# Altium PCB MainBlock.PcbDoc (part 2 of 2)
Units mm, origin at the board's own origin, x right, y up, seen from the top; angles counter-clockwise.
Board outline 152.4 x 101.6 mm, 2 copper layers (Top Layer, Bottom Layer); 89 components, 179 nets, 467 pads, 175 vias.
Unrouted connection lines stored in the file: 9.
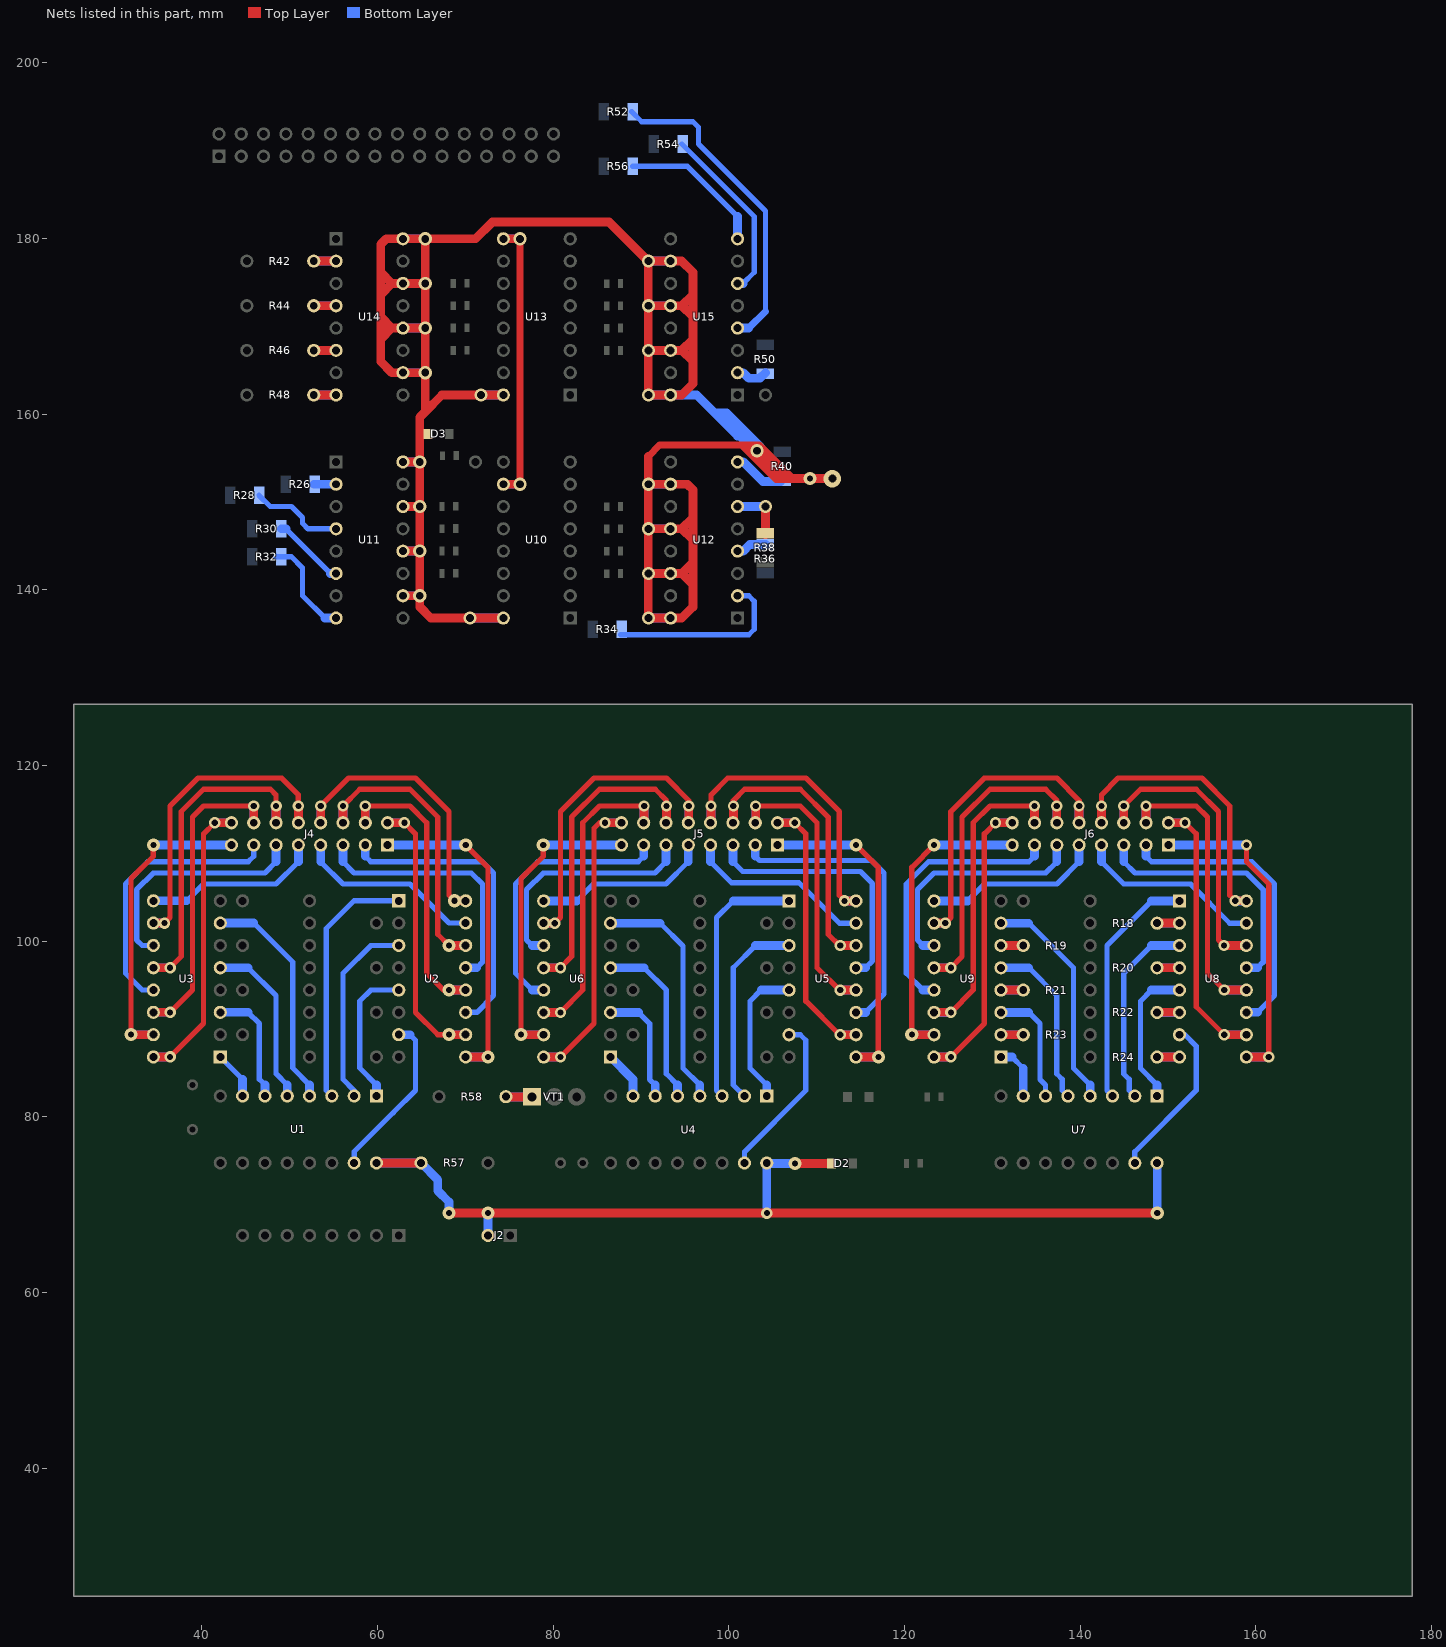
[diagram p2: the nets of this part, all layers, seen from the top]

## Via types
v1: diameter 1.5, hole 0.9, Top Layer to Bottom Layer, 65 vias
v2: diameter 1.5, hole 0.7, Top Layer to Bottom Layer, 31 vias
v3: diameter 1.27, hole 0.711, Top Layer to Bottom Layer, 31 vias
v4: diameter 1.3, hole 0.7, Top Layer to Bottom Layer, 30 vias
v5: diameter 2, hole 0.9, Top Layer to Bottom Layer, 5 vias
v6: diameter 0.3, hole 0.2, Top Layer to Bottom Layer, 4 vias
v7: diameter 0.5, hole 0.2, Top Layer to Bottom Layer, 4 vias
v8: diameter 1, hole 0.5, Top Layer to Bottom Layer, 4 vias
v9: diameter 1.3, hole 0.7, Top Layer to Bottom Layer, tented bottom, 1 vias

## Nets (pads, with @x,y where several pads share a name; then routed paths per layer and width w, separated by ;. In a path a pad name is that pad's centre, name@x,y a point inside that pad or via, vN(x,y) a via of type N, cw(c..) or ccw(c..) an arc to the next point about the centre after c; other vN are vias at no path point) (continued)
NetR18_2: R18.2 U8.2 | length 5.1
  Top Layer w1: R18.2@148.78,102.06 U8.2@151.3,102.06
  Bottom Layer w1: R18.2@148.77,102.05 U8.2@151.31,102.05
NetR19_2: R19.2 U9.6 | length 5.1
  Top Layer w1: U9.6@130.99,99.51 R19.2@133.53,99.51
  Bottom Layer w1: U9.6@130.99,99.51 R19.2@133.53,99.51
NetR20_2: R20.2 U8.4 | length 5.1
  Top Layer w1: R20.2@148.77,96.97 U8.4@151.31,96.97
  Bottom Layer w1: R20.2@148.77,96.97 U8.4@151.31,96.97
NetR21_2: R21.2 U9.4 | length 5.1
  Top Layer w1: U9.4@130.99,94.43 R21.2@133.53,94.43
  Bottom Layer w1: U9.4@130.99,94.43 R21.2@133.53,94.43
NetR22_2: R22.2 U8.6 | length 5.1
  Top Layer w1: R22.2@148.78,91.9 U8.6@151.3,91.9
  Bottom Layer w1: R22.2@148.77,91.89 U8.6@151.31,91.89
NetR23_2: R23.2 U9.2 | length 5.1
  Top Layer w1: U9.2@130.99,89.35 R23.2@133.53,89.35
  Bottom Layer w1: U9.2@130.99,89.35 R23.2@133.53,89.35
NetR24_2: R24.2 U8.8 | length 5.1
  Top Layer w1: R24.2@148.77,86.81 U8.8@151.31,86.81
  Bottom Layer w1: R24.2@148.77,86.81 U8.8@151.31,86.81
NetR26_2: R26.2 U11.2 | length 2.5
  Bottom Layer w1: R26.2@52.74,152.035 U11.2@55.28,152.035
NetR28_2: R28.2 U11.4 | length 10.7
  Bottom Layer w0.6: R28.2@46.515,150.765 47.785,149.495 50.2,149.495 51.47,148.225 51.47,147.59 52.105,146.955 U11.4@55.28,146.955
NetR30_2: R30.2 U11.6 | length 8.3
  Bottom Layer w0.6: R30.2@49.565,146.955 U11.6@54.645,141.875
  Bottom Layer w1: R30.2@49.055,146.955 R30.2@49.565,146.955 ; U11.6@54.645,141.875 U11.6@55.28,141.875
NetR32_2: R32.2 U11.8 | length 11.6
  Bottom Layer w0.6: 48.42,143.78 50.2,143.78 51.47,142.51 51.47,139.335 54.01,136.795
  Bottom Layer w1: 54.01,136.795 U11.8@55.28,136.795
NetR34_2: R34.2 U12.2 | length 20.8
  Bottom Layer w0.6: R34.2@87.665,134.89 102.27,134.89 102.905,135.525 102.905,138.7 102.27,139.335 U12.2@101,139.335
NetR36_2: R36.2 U12.4 | length 3.5
  Bottom Layer w1: U12.4@101,144.415 101.635,144.415 102.395,145.175 R36.2@104.175,145.175
NetR38_2: R38.2 U12.6 | length 6.4
  Top Layer w1: R38.2@104.175,146.32 R38.2@104.175,146.445 v1(104.175,149.495)
  Bottom Layer w1: U12.6@101,149.495 v1(104.175,149.495)
NetR40_2: R40.2 U12.8 | length 5.8
  Bottom Layer w1: U12.8@101,154.575 101.635,154.575 103.857,152.352 R40.2@105.888,152.352
NetR42_2: R42.2 U14.2 | length 5.1
  Top Layer w1: R42.2@52.74,177.435 U14.2@55.28,177.435
  Bottom Layer w1: R42.2@52.74,177.435 U14.2@55.28,177.435
NetR44_2: R44.2 U14.4 | length 5.1
  Top Layer w1: R44.2@52.74,172.355 U14.4@55.28,172.355
  Bottom Layer w1: R44.2@52.74,172.355 U14.4@55.28,172.355
NetR46_2: R46.2 U14.6 | length 5.1
  Top Layer w1: R46.2@52.74,167.275 U14.6@55.28,167.275
  Bottom Layer w1: R46.2@52.74,167.275 U14.6@55.28,167.275
NetR48_2: R48.2 U14.8 | length 5.1
  Top Layer w1: R48.2@52.74,162.195 U14.8@55.28,162.195
  Bottom Layer w1: R48.2@52.74,162.195 U14.8@55.28,162.195
NetR50_2: R50.2 U15.2 | length 3.7
  Bottom Layer w1: U15.2@101,164.735 101.635,164.735 102.27,164.1 103.54,164.1 R50.2@104.175,164.735
NetR52_2: R52.2 U15.4 | length 36.4
  Bottom Layer w0.6: R52.2@88.935,194.46 90.085,193.31 95.92,193.31 96.555,192.675 96.555,190.77 104.175,183.15 104.175,171.72
  Bottom Layer w0.8: 102.27,169.815 104.175,171.72
  Bottom Layer w1: U15.4@101,169.815 102.27,169.815
NetR54_2: R54.2 U15.6 | length 20.5
  Bottom Layer w0.6: R54.2@94.65,190.77 102.905,182.515 102.905,176.165 U15.6@101.635,174.895
  Bottom Layer w1: U15.6@101,174.895 U15.6@101.635,174.895
NetR56_2: R56.2 U15.8 | length 16.8
  Bottom Layer w0.6: R56.2@89.06,188.23 95.285,188.23 101,182.515
  Bottom Layer w1: U15.8@101,179.975 101,182.515
NetR58_2: R58.2 VT1.B | length 5.9
  Top Layer w1: R58.2@74.645,82.275 VT1.B@77.595,82.275
  Bottom Layer w1: R58.2@74.645,82.275 VT1.B@77.595,82.275
OA1: J4.1 U2.9 | length 39.2
  Top Layer w0.6: v2(70.04,110.95) 72.58,108.41 v2(72.58,86.82)
  Top Layer w1: U2.9@70.04,86.82 v2(72.58,86.82)
  Bottom Layer w1: J4.1@61.15,110.95 v2(70.04,110.95) ; U2.9@70.04,86.82 v2(72.58,86.82)
OA2: J4.3 U2.11 | length 34.6
  Bottom Layer w0.6: 58.61,109.68 59.245,109.045 71.945,109.045 73.215,107.775 73.215,93.805 71.31,91.9 U2.11@70.04,91.9
  Bottom Layer w1: 58.61,109.68 J4.3@58.61,110.95
OA3: J4.5 U2.13 | length 29.9
  Bottom Layer w0.6: 56.07,109.045 57.34,107.775 70.675,107.775 71.945,106.505 71.945,97.615 71.31,96.98
  Bottom Layer w1: 56.07,109.045 J4.5@56.07,110.95 ; U2.13@70.04,96.98 71.31,96.98
OA4: J4.7 U2.15 | length 21.3
  Bottom Layer w0.6: 53.53,109.045 56.07,106.505 63.69,106.505 68.135,102.06 U2.15@70.04,102.06
  Bottom Layer w1: 53.53,109.045 J4.7@53.53,110.95
OA5: J4.9 U3.9 | length 20.3
  Bottom Layer w0.6: 38.29,104.6 40.195,106.505 48.45,106.505 50.99,109.045
  Bottom Layer w1: U3.9@34.48,104.6 38.29,104.6 ; 50.99,109.045 J4.9@50.99,110.95
OA6: J4.11 U3.11 | length 27
  Bottom Layer w0.6: U3.11@34.48,99.52 33.21,99.52 32.575,100.155 32.575,105.87 34.48,107.775 47.18,107.775 48.45,109.045
  Bottom Layer w1: 48.45,109.045 J4.11@48.45,110.95
OA7: J4.13 U3.13 | length 31.3
  Bottom Layer w0.6: U3.13@34.48,94.44 33.21,94.44 31.305,96.345 31.305,106.505 33.845,109.045 45.275,109.045 45.91,109.68 J4.13@45.91,110.95
OA8: J4.15 U3.15 | length 36.6
  Top Layer w0.6: v2(31.94,89.36) 31.94,107.14 34.48,109.68 v2(34.48,110.95)
  Top Layer w1: v2(31.94,89.36) U3.15@34.48,89.36
  Bottom Layer w1: v2(31.94,89.36) U3.15@34.48,89.36 ; v2(34.48,110.95) J4.15@43.37,110.95
OA9: J5.1 U5.9 | length 41.8
  Top Layer w0: U5.9@114.48,86.81 v2@117.02,86.81
  Top Layer w0.6: v2(114.49,110.95) 117.03,108.41 v2(117.03,86.82)
  Top Layer w1: U5.9@114.48,86.81 v2@117.02,86.81
  Bottom Layer w1: J5.1@105.55,110.95 v2(114.49,110.95) ; U5.9@114.48,86.81 v2(117.03,86.82)
OA10: J5.3 U5.11 | length 34.5
  Bottom Layer w0.6: 103.01,109.68 103.495,109.195 116.245,109.195 117.665,107.775 117.665,94.005 115.55,91.89
  Bottom Layer w1: 103.01,109.68 J5.3@103.01,110.95 ; U5.11@114.48,91.89 115.55,91.89
OA11: J5.5 U5.13 | length 29.8
  Bottom Layer w0.6: 100.47,109.045 101.59,107.925 114.975,107.925 116.345,106.555 116.345,97.765 115.55,96.97
  Bottom Layer w1: 100.47,109.045 J5.5@100.47,110.95 ; U5.13@114.48,96.97 115.55,96.97
OA12: J5.7 U5.15 | length 21.4
  Bottom Layer w0.6: 97.93,109.045 100.32,106.655 107.99,106.655 112.595,102.05 U5.15@114.48,102.05
  Bottom Layer w1: 97.93,109.045 J5.7@97.93,110.95
OA13: J5.9 U6.9 | length 20.2
  Bottom Layer w0.6: 82.68,104.59 84.595,106.505 92.85,106.505 95.39,109.045
  Bottom Layer w1: U6.9@78.92,104.59 82.68,104.59 ; 95.39,109.045 J5.9@95.39,110.95
OA14: J5.11 U6.11 | length 27
  Bottom Layer w0.6: 77.62,99.51 76.975,100.155 76.975,105.87 78.88,107.775 91.58,107.775 92.85,109.045
  Bottom Layer w1: 77.62,99.51 U6.11@78.92,99.51 ; 92.85,109.045 J5.11@92.85,110.95
OA15: J5.13 U6.13 | length 31.4
  Bottom Layer w0.6: 77.62,94.43 75.705,96.345 75.705,106.505 78.245,109.045 89.675,109.045 90.31,109.68
  Bottom Layer w1: 77.62,94.43 U6.13@78.92,94.43 ; 90.31,109.68 J5.13@90.31,110.95
OA16: J5.15 U6.15 | length 36.6
  Top Layer w0.6: v2(76.34,89.36) 76.34,107.14 78.88,109.68 v2(78.88,110.95)
  Top Layer w1: v2@76.4,89.35 U6.15@78.92,89.35
  Bottom Layer w1: v2@76.34,89.35 U6.15@78.92,89.35 ; v2(78.88,110.95) J5.15@87.77,110.95
OA17: J6.1 U8.9 | length 39.2
  Top Layer w0.6: v3(158.94,110.95) 158.94,109.045 161.48,106.505 v3(161.48,86.82)
  Top Layer w1: U8.9@158.93,86.81 v3@161.47,86.81
  Bottom Layer w0.6: U8.9@158.93,86.81 U8.9@158.94,86.82
  Bottom Layer w1: J6.1@150.05,110.95 v3(158.94,110.95) ; U8.9@158.94,86.82 v3(161.48,86.82)
OA18: J6.3 U8.11 | length 33.9
  Bottom Layer w0.6: 147.51,109.68 148.145,109.045 159.575,109.045 162.115,106.505 162.115,93.805 160.21,91.9 ; U8.11@158.93,91.89 U8.11@158.94,91.9
  Bottom Layer w1: 147.51,109.68 J6.3@147.51,110.95 ; U8.11@158.94,91.9 160.21,91.9
OA19: J6.5 U8.13 | length 29.5
  Bottom Layer w0.6: 144.97,109.045 146.24,107.775 158.94,107.775 160.845,105.87 160.845,97.615 160.2,96.97
  Bottom Layer w1: 144.97,109.045 J6.5@144.97,110.95 ; U8.13@158.93,96.97 160.2,96.97
OA20: J6.7 U8.15 | length 21.3
  Bottom Layer w0.6: 142.43,109.045 144.97,106.505 152.59,106.505 157.045,102.05 U8.15@158.93,102.05
  Bottom Layer w1: 142.43,109.045 J6.7@142.43,110.95
OA21: J6.9 U9.9 | length 20.3
  Bottom Layer w0.6: 127.18,104.59 129.095,106.505 137.35,106.505 139.89,109.045
  Bottom Layer w1: U9.9@123.37,104.59 127.18,104.59 ; 139.89,109.045 J6.9@139.89,110.95
OA22: J6.11 U9.11 | length 27
  Bottom Layer w0.6: 122.11,99.52 121.475,100.155 121.475,105.87 123.38,107.775 136.08,107.775 137.35,109.045 ; U9.11@123.36,99.52 U9.11@123.37,99.51
  Bottom Layer w1: 122.11,99.52 U9.11@123.36,99.52 ; 137.35,109.045 J6.11@137.35,110.95
OA23: J6.13 U9.13 | length 31.3
  Bottom Layer w0.6: 122.11,94.44 120.205,96.345 120.205,106.505 122.745,109.045 134.175,109.045 134.81,109.68 ; U9.13@123.36,94.44 U9.13@123.37,94.43
  Bottom Layer w1: 122.11,94.44 U9.13@123.36,94.44 ; 134.81,109.68 J6.13@134.81,110.95
OA24: J6.15 U9.15 | length 36.6
  Top Layer w0.6: v2(120.84,89.36) 120.84,108.41 v2(123.38,110.95)
  Top Layer w1: v2@120.85,89.35 U9.15@123.37,89.35
  Bottom Layer w1: v2@120.84,89.35 U9.15@123.37,89.35 ; v2(123.38,110.95) J6.15@132.27,110.95
OB1: J4.2 U2.10 | length 34.6
  Top Layer w0.6: v4(63.055,113.49) 64.325,112.22 64.325,91.9 66.865,89.36 v2(68.135,89.36)
  Top Layer w1: J4.2@61.15,113.49 v4(63.055,113.49) ; v2(68.135,89.36) U2.10@70.04,89.36
  Bottom Layer w1: J4.2@61.15,113.49 v4(63.055,113.49) ; v2(68.135,89.36) U2.10@70.04,89.36
OB2: J4.4 U2.12 | length 35.9
  Top Layer w0.6: v9(58.61,115.395) 63.69,115.395 65.595,113.49 65.595,96.345 67.5,94.44 v2(68.135,94.44)
  Top Layer w1: J4.4@58.61,113.49 v9(58.61,115.395) ; v2(68.135,94.44) U2.12@70.04,94.44
  Bottom Layer w1: J4.4@58.61,113.49 v9(58.61,115.395) ; v2(68.135,94.44) U2.12@70.04,94.44
OB3: J4.6 U2.14 | length 35.7
  Top Layer w0.6: v4(56.07,115.395) 57.975,117.3 63.69,117.3 66.865,114.125 66.865,100.79 v2(68.135,99.52)
  Top Layer w1: J4.6@56.07,113.49 v4(56.07,115.395) ; v2(68.135,99.52) U2.14@70.04,99.52
  Bottom Layer w1: J4.6@56.07,113.49 v4(56.07,115.395) ; v2(68.135,99.52) U2.14@70.04,99.52
OB4: J4.8 U2.16 | length 34.3
  Top Layer w0.6: v4(53.53,115.395) 56.705,118.57 64.325,118.57 68.135,114.76 68.135,105.235 v2(68.77,104.6)
  Top Layer w1: J4.8@53.53,113.49 v4(53.53,115.395) ; v2(68.77,104.6) U2.16@70.04,104.6
  Bottom Layer w1: J4.8@53.53,113.49 v4(53.53,115.395) ; v2(68.77,104.6) U2.16@70.04,104.6
OB5: J4.10 U3.10 | length 37.9
  Top Layer w0.6: v4(35.75,102.06) 36.385,102.695 36.385,115.395 39.56,118.57 49.085,118.57 50.99,116.665 v4(50.99,115.395)
  Top Layer w1: U3.10@34.48,102.06 v4(35.75,102.06) ; J4.10@50.99,113.49 v4(50.99,115.395)
  Bottom Layer w1: U3.10@34.48,102.06 v4(35.75,102.06) ; J4.10@50.99,113.49 v4(50.99,115.395)
OB6: J4.12 U3.12 | length 39.3
  Top Layer w0.6: v4(36.385,96.98) 37.655,98.25 37.655,114.76 40.195,117.3 47.815,117.3 48.45,116.665 v4(48.45,115.395)
  Top Layer w1: U3.12@34.48,96.98 v4(36.385,96.98) ; J4.12@48.45,113.49 v4(48.45,115.395)
  Bottom Layer w1: U3.12@34.48,96.98 v4(36.385,96.98) ; J4.12@48.45,113.49 v4(48.45,115.395)
OB7: J4.14 U3.14 | length 38.4
  Top Layer w0.6: v4(36.385,91.9) 38.925,94.44 38.925,114.125 40.195,115.395 v4(45.91,115.395)
  Top Layer w1: U3.14@34.48,91.9 v4(36.385,91.9) ; J4.14@45.91,113.49 v4(45.91,115.395)
  Bottom Layer w1: U3.14@34.48,91.9 v4(36.385,91.9) ; J4.14@45.91,113.49 v4(45.91,115.395)
OB8: J4.16 U3.16 | length 36.4
  Top Layer w0.6: v4(36.385,86.82) 40.195,90.63 40.195,112.22 v4(41.465,113.49)
  Top Layer w1: U3.16@34.48,86.82 v4(36.385,86.82) ; v4(41.465,113.49) J4.16@43.37,113.49
  Bottom Layer w1: U3.16@34.48,86.82 v4(36.385,86.82) ; v4(41.465,113.49) J4.16@43.37,113.49
OB9: J5.2 U5.10 | length 33.8
  Top Layer w0.6: v3(107.505,113.49) 108.775,112.22 108.775,93.17 112.595,89.35 v4(112.695,89.35)
  Top Layer w1: J5.2@105.6,113.49 v3(107.505,113.49) ; v4(112.695,89.35) U5.10@114.48,89.35
  Bottom Layer w1: J5.2@105.55,113.49 v3(107.505,113.49) ; v4(112.695,89.35) U5.10@114.48,89.35
OB10: J5.4 U5.12 | length 35.3
  Top Layer w0.6: v3(103.06,115.395) 108.14,115.395 110.045,113.49 110.045,96.98 112.595,94.43 v4(112.695,94.43)
  Top Layer w1: J5.4@103.06,113.54 v3(103.06,115.395) ; v4(112.695,94.43) U5.12@114.48,94.43
  Bottom Layer w1: J5.4@103.06,113.54 v3(103.06,115.395) ; v4(112.695,94.43) U5.12@114.48,94.43
OB11: J5.6 U5.14 | length 35.9
  Top Layer w0.6: v3(100.52,115.395) 100.52,116.03 101.79,117.3 108.14,117.3 111.315,114.125 111.315,100.79 112.595,99.51 v4(112.695,99.51)
  Top Layer w1: J5.6@100.52,113.54 v3(100.52,115.395) ; v4@112.595,99.51 U5.14@114.48,99.51
  Bottom Layer w1: J5.6@100.52,113.54 v3(100.52,115.395) ; v4(112.695,99.51) U5.14@114.48,99.51
OB12: J5.8 U5.16 | length 35
  Top Layer w0.6: v3(97.98,115.395) 97.98,116.665 99.885,118.57 108.775,118.57 112.585,114.76 112.585,105.235 113.23,104.59 v4(113.17,104.59)
  Top Layer w1: J5.8@97.98,113.54 v3(97.98,115.395) ; v4@113.23,104.59 U5.16@114.48,104.59
  Bottom Layer w1: J5.8@97.98,113.54 v3(97.98,115.395) ; v4(113.17,104.59) U5.16@114.48,104.59
OB13: J5.10 U6.10 | length 37.1
  Top Layer w0.6: v3(80.19,102.05) 80.835,102.695 80.835,114.76 84.645,118.57 92.9,118.57 95.44,116.03 v3(95.44,115.395)
  Top Layer w1: U6.10@78.92,102.05 v3(80.19,102.05) ; J5.10@95.44,113.49 v3(95.44,115.395)
  Bottom Layer w1: U6.10@78.92,102.05 v3(80.19,102.05) ; J5.10@95.44,113.54 v3(95.44,115.395)
OB14: J5.12 U6.12 | length 38.5
  Top Layer w0.6: v3(80.825,96.97) 82.105,98.25 82.105,114.125 85.28,117.3 91.63,117.3 92.9,116.03 v3(92.9,115.395)
  Top Layer w1: U6.12@78.92,96.97 v3(80.825,96.97) ; J5.12@92.9,113.49 v3(92.9,115.395)
  Bottom Layer w1: U6.12@78.92,96.97 v3(80.825,96.97) ; J5.12@92.9,113.54 v3(92.9,115.395)
OB15: J5.14 U6.14 | length 38
  Top Layer w0.6: v3(80.825,91.89) 83.375,94.44 83.375,113.49 85.28,115.395 v3(90.36,115.395)
  Top Layer w1: U6.14@78.92,91.89 v3(80.825,91.89) ; J5.14@90.36,113.54 v3(90.36,115.395)
  Bottom Layer w1: U6.14@78.92,91.89 v3(80.825,91.89) ; J5.14@90.36,113.54 v3(90.36,115.395)
OB16: J5.16 U6.16 | length 36.7
  Top Layer w0.6: v3(80.835,86.82) 84.645,90.63 84.645,112.855 85.28,113.49 v3(85.915,113.49)
  Top Layer w1: U6.16@78.92,86.81 v3@80.825,86.81 ; v3(85.915,113.49) J5.16@87.77,113.49
  Bottom Layer w1: U6.16@78.92,86.81 v3@80.825,86.81 ; v3(85.915,113.49) J5.16@87.77,113.49
OB17: J6.2 U8.10 | length 34.8
  Top Layer w0.6: v3(151.955,113.49) 153.225,112.22 153.225,92.535 v3(156.41,89.35)
  Top Layer w1: J6.2@150.05,113.49 v3(151.955,113.49) ; v3(156.41,89.35) U8.10@158.93,89.35
  Bottom Layer w1: J6.2@150.05,113.49 v3(151.955,113.49) ; v3(156.41,89.35) U8.10@158.93,89.35
OB18: J6.4 U8.12 | length 36.8
  Top Layer w0.6: v3(147.51,115.395) 153.225,115.395 154.495,114.125 154.495,96.345 v3(156.41,94.43)
  Top Layer w1: J6.4@147.51,113.49 v3(147.51,115.395) ; v3(156.41,94.43) U8.12@158.93,94.43
  Bottom Layer w1: J6.4@147.51,113.49 v3(147.51,115.395) ; v3(156.41,94.43) U8.12@158.93,94.43
OB19: J6.6 U8.14 | length 37
  Top Layer w0.6: v3(144.97,115.395) 146.875,117.3 153.225,117.3 155.765,114.76 155.765,100.155 v3(156.4,99.52)
  Top Layer w1: J6.6@144.97,113.49 v3(144.97,115.395) ; v3(156.4,99.52) U8.14@158.92,99.52
  Bottom Layer w1: J6.6@144.97,113.49 v3(144.97,115.395) ; v3@156.41,99.51 U8.14@158.93,99.51
OB20: J6.8 U8.16 | length 35.4
  Top Layer w0.6: v3(142.43,115.395) 142.43,116.665 144.335,118.57 153.86,118.57 157.035,115.395 157.035,105.235 v3(157.67,104.6)
  Top Layer w1: J6.8@142.43,113.49 v3(142.43,115.395) ; v3(157.67,104.6) U8.16@158.92,104.6
  Bottom Layer w1: J6.8@142.43,113.49 v3(142.43,115.395) ; v3@157.67,104.59 U8.16@158.93,104.59
OB21: J6.10 U9.10 | length 37.2
  Top Layer w0.6: v4(124.65,102.06) 125.285,102.695 125.285,114.76 129.095,118.57 137.35,118.57 139.89,116.03 v3(139.89,115.395)
  Top Layer w1: U9.10@123.38,102.06 v4(124.65,102.06) ; J6.10@139.89,113.49 v3(139.89,115.395)
  Bottom Layer w1: U9.10@123.37,102.05 v4@124.65,102.05 ; J6.10@139.89,113.49 v3(139.89,115.395)
OB22: J6.12 U9.12 | length 38.6
  Top Layer w0.6: v4(125.285,96.98) 126.555,98.25 126.555,114.125 129.73,117.3 136.08,117.3 137.35,116.03 v3(137.35,115.395)
  Top Layer w1: U9.12@123.38,96.98 v4(125.285,96.98) ; J6.12@137.35,113.49 v3(137.35,115.395)
  Bottom Layer w1: U9.12@123.37,96.97 v4@125.285,96.97 ; J6.12@137.35,113.49 v3(137.35,115.395)
OB23: J6.14 U9.14 | length 38.1
  Top Layer w0.6: v4(125.285,91.9) 127.825,94.44 127.825,113.49 129.73,115.395 v3(134.81,115.395)
  Top Layer w1: U9.14@123.38,91.9 v4(125.285,91.9) ; J6.14@134.81,113.49 v3(134.81,115.395)
  Bottom Layer w0.6: U9.14@123.37,91.89 U9.14@123.38,91.9
  Bottom Layer w1: U9.14@123.37,91.89 v4@125.285,91.89 ; J6.14@134.81,113.49 v3(134.81,115.395)
OB24: J6.16 U9.16 | length 36.4
  Top Layer w0.6: v4(125.285,86.82) 129.095,90.63 129.095,112.22 v3(130.365,113.49)
  Top Layer w1: U9.16@123.38,86.82 v4(125.285,86.82) ; v3(130.365,113.49) J6.16@132.27,113.49
  Bottom Layer w1: U9.16@123.37,86.81 125.275,86.81 v4(125.285,86.82) ; v3(130.365,113.49) J6.16@132.27,113.49
Q1: U1.15 U2.7 | length 19
  Bottom Layer w0.6: U1.15@57.34,74.755 57.34,76.025 61.785,80.47 64.325,83.01 64.325,88.725 63.69,89.36
  Bottom Layer w1: U2.7@62.42,89.36 63.69,89.36
Q2: U1.1 U2.5 | length 16.6
  Bottom Layer w0.6: 59.88,83.645 57.975,85.55 57.975,93.17 59.245,94.44 U2.5@62.42,94.44
  Bottom Layer w1: U1.1@59.88,82.375 59.88,83.645
Q3: U1.2 U2.3 | length 22.2
  Bottom Layer w0.6: U1.2@57.34,82.375 57.34,83.01 56.07,84.28 56.07,96.345 59.245,99.52 U2.3@62.42,99.52
Q4: U1.3 U2.1 | length 28.9
  Bottom Layer w0.6: U1.3@54.8,82.375 54.165,83.01 54.165,101.425 57.34,104.6 U2.1@62.42,104.6
Q5: U1.4 U3.7 | length 26.1
  Bottom Layer w0.6: 45.91,102.06 50.355,97.615 50.355,85.55 52.26,83.645
  Bottom Layer w1: U3.7@42.1,102.06 45.91,102.06 ; U1.4@52.26,82.375 52.26,83.645
Q6: U1.5 U3.5 | length 19.6
  Bottom Layer w0.6: 45.275,96.98 48.45,93.805 48.45,84.915 49.72,83.645
  Bottom Layer w1: U3.5@42.1,96.98 45.275,96.98 ; U1.5@49.72,82.375 49.72,83.645
Q7: U1.6 U3.3 | length 13.5
  Bottom Layer w0.6: 45.275,91.9 46.545,90.63 46.545,84.28 47.18,83.645
  Bottom Layer w1: U3.3@42.1,91.9 45.275,91.9 ; U1.6@47.18,82.375 47.18,83.645
Q8: U1.7 U3.1 | length 4.9
  Bottom Layer w0.6: U3.1@42.1,86.82 44.64,84.28
  Bottom Layer w1: U1.7@44.64,83.01 44.64,84.28
Q9: U4.15 U5.7 | length 19
  Bottom Layer w0.6: U4.15@101.78,74.745 101.78,76.015 108.765,83 108.765,88.715 108.13,89.35 U5.7@106.86,89.35
Q10: U4.1 U5.5 | length 16.6
  Bottom Layer w0.6: 103.685,94.43 102.415,93.16 102.415,85.54 104.32,83.635
  Bottom Layer w1: 103.685,94.43 U5.5@106.86,94.43 ; U4.1@104.32,82.365 104.32,83.635
Q11: U4.2 U5.3 | length 22.5
  Bottom Layer w0.6: U4.2@101.78,82.365 100.51,83.635 100.51,96.97 103.05,99.51
  Bottom Layer w1: 103.05,99.51 U5.3@106.86,99.51
Q12: U4.3 U5.1 | length 29.6
  Bottom Layer w0.6: U4.3@99.24,82.365 98.605,83 98.605,102.685 100.51,104.59
  Bottom Layer w1: 100.51,104.59 U5.1@106.86,104.59
Q13: U4.4 U6.7 | length 27.2
  Bottom Layer w0.6: 92.194,102.05 94.795,99.449 94.795,85.54 96.7,83.635
  Bottom Layer w1: U6.7@86.54,102.05 92.194,102.05 ; U4.4@96.7,82.365 96.7,83.635
Q14: U4.5 U6.5 | length 20
  Bottom Layer w0.6: 90.35,96.97 92.89,94.43 92.89,84.905 94.16,83.635
  Bottom Layer w1: U6.5@86.54,96.97 90.35,96.97 ; U4.5@94.16,82.365 94.16,83.635
Q15: U4.6 U6.3 | length 13.5
  Bottom Layer w0.6: 89.715,91.89 90.985,90.62 90.985,84.27 91.62,83.635
  Bottom Layer w1: U6.3@86.54,91.89 89.715,91.89 ; U4.6@91.62,82.365 91.62,83.635
Q16: U4.7 U6.1 | length 5.5
  Bottom Layer w1: U6.1@86.54,86.81 89.08,84.27 U4.7@89.08,82.365
Q17: U7.15 U8.7 | length 18.7
  Bottom Layer w0.6: U7.15@146.23,74.745 146.23,76.015 153.215,83 153.215,88.08 151.945,89.35 U8.7@151.31,89.35
Q18: U7.1 U8.5 | length 16.6
  Bottom Layer w0.6: 148.135,94.43 146.865,93.16 146.865,85.54 148.77,83.635
  Bottom Layer w1: 148.135,94.43 U8.5@151.31,94.43 ; U7.1@148.77,82.365 148.77,83.635
Q19: U7.2 U8.3 | length 22.2
  Bottom Layer w0.6: U7.2@146.23,82.365 145.595,83 145.595,84.27 144.96,84.905 144.96,96.335 148.135,99.51
  Bottom Layer w1: 148.135,99.51 U8.3@151.31,99.51
Q20: U7.3 U8.1 | length 27.8
  Bottom Layer w0.6: U7.3@143.69,82.365 143.055,83 143.055,99.51 148.135,104.59
  Bottom Layer w1: 148.135,104.59 U8.1@151.31,104.59
Q21: U7.4 U9.7 | length 25.8
  Bottom Layer w0.6: 134.165,102.05 139.245,96.97 139.245,85.54 141.15,83.635
  Bottom Layer w1: U9.7@130.99,102.05 134.165,102.05 ; U7.4@141.15,82.365 141.15,83.635
Q22: U7.5 U9.5 | length 19.6
  Bottom Layer w0.6: 134.165,96.97 137.34,93.795 137.34,84.905 137.975,84.27 137.975,83 U7.5@138.61,82.365
  Bottom Layer w1: U9.5@130.99,96.97 134.165,96.97
Q23: U7.6 U9.3 | length 13.5
  Bottom Layer w0.6: 134.165,91.89 135.435,90.62 135.435,84.27 136.07,83.635 U7.6@136.07,82.365
  Bottom Layer w1: U9.3@130.99,91.89 134.165,91.89
Q24: U7.7 U9.1 | length 6.2
  Bottom Layer w0.6: 132.26,86.81 133.53,85.54
  Bottom Layer w1: U9.1@130.99,86.81 132.26,86.81 ; U7.7@133.53,82.365 133.53,85.54
"SERIAL 165": U10.10 U13.9 | length 35.6
  Top Layer w0.8: v1(76.235,152.035) v1(76.235,179.975)
  Top Layer w1: U10.10@74.33,152.035 v1(76.235,152.035) ; U13.9@74.33,179.975 v1(76.235,179.975)
  Bottom Layer w1: U10.10@74.33,152.035 v1(76.235,152.035) ; U13.9@74.33,179.975 v1(76.235,179.975)
VCC: D2.A D3.A J2.2 R57.1 U1.16 U4.16 U7.16 U10.16 U11.10 U11.12 U11.14 U11.16 U12.10 U12.12 U12.14 U12.16 U13.16 U14.10 U14.12 U14.14 U14.16 U15.10 U15.12 U15.14 U15.16 | length 470.1
  Top Layer w0.8: 90.84,155.21 92.11,156.48 103.495,156.48 107.125,152.85 ; 101.635,156.36 102.27,155.725 ; v1@102.905,156.36 106.595,152.67
  Top Layer w1: U1.16@59.88,74.755 R57.1@64.96,74.755 ; 60.36,168.545 61.63,169.815 60.36,171.085 ; 60.36,169.815 U14.12@62.9,169.815 v1(65.44,169.815) ; U11.10@62.9,139.335 v1(64.805,139.335) ; U11.12@62.9,144.415 v1(64.805,144.415) ; U11.14@62.9,149.495 v1(64.805,149.495) ; U11.16@62.9,154.575 v1(64.805,154.575) ; v2(68.135,69.04) v2(72.58,69.04) v4(104.33,69.04) v2(148.78,69.04) ; U10.16@74.33,136.795 v1(70.52,136.795) 66.075,136.795 64.805,138.065 64.805,159.655 65.44,160.29 ; U13.16@74.33,162.195 v1(71.79,162.195) 67.345,162.195 65.44,160.29 ; 90.84,155.21 v1(90.84,152.035) ; 95.92,140.605 94.65,141.875 ; 95.92,143.145 94.65,141.875 ; 95.92,145.685 94.65,146.955 ; 95.92,148.225 94.65,146.955 ; 95.92,166.005 94.65,167.275 ; 95.92,168.545 94.65,167.275 ; 95.92,171.085 94.65,172.355 ; 95.92,173.625 94.65,172.355 ; 102.39,155.725 105.445,152.67 v2(109.255,152.67) v5(111.795,152.67) ; v2(107.55,74.7) D2.A@111.7,74.7 ; 60.36,173.625 60.36,176.165 ; 60.36,173.625 61.63,174.895 ; 60.36,173.625 60.36,166.005 61.63,164.735 U14.10@62.9,164.735 v1(65.44,164.735) ; 60.36,176.165 61.63,174.895 ; 60.36,176.165 60.36,179.34 60.995,179.975 U14.16@62.9,179.975 v1(65.44,179.975) ; 61.63,174.895 U14.14@62.9,174.895 v1(65.44,174.895) ; 65.44,160.29 v1(65.44,164.735) ; v1(65.44,164.735) v1(65.44,169.815) ; v1(65.44,169.815) v1(65.44,174.895) ; v1(65.44,174.895) v1(65.44,179.975) ; v1(65.44,179.975) 71.155,179.975 73.06,181.88 86.395,181.88 v1(90.84,177.435) ; v1(90.84,141.875) U12.14@93.38,141.875 94.65,141.875 ; v1(90.84,141.875) v1(90.84,136.795) U12.16@93.38,136.795 94.65,136.795 95.92,138.065 95.92,151.4 95.285,152.035 U12.10@93.38,152.035 v1(90.84,152.035) ; v1(90.84,141.875) v1(90.84,146.955) ; v1(90.84,146.955) U12.12@93.38,146.955 94.65,146.955 ; v1(90.84,146.955) v1(90.84,152.035) ; v1(90.84,167.275) U15.14@93.38,167.275 94.65,167.275 ; v1(90.84,167.275) v1(90.84,162.195) U15.16@93.38,162.195 94.65,162.195 95.92,163.465 95.92,176.165 94.65,177.435 U15.10@93.38,177.435 v1(90.84,177.435) ; v1(90.84,167.275) v1(90.84,172.355) ; v1(90.84,172.355) U15.12@93.38,172.355 94.65,172.355 ; v1(90.84,172.355) v1(90.84,177.435)
  Bottom Layer w0.8: v2(109.255,152.67) v5(111.795,152.67)
  Bottom Layer w1: U1.16@59.88,74.755 R57.1@64.96,74.755 66.865,72.85 66.865,71.58 68.135,70.31 v2(68.135,69.04) ; U11.10@62.9,139.335 v1(64.805,139.335) ; U11.12@62.9,144.415 v1(64.805,144.415) ; U11.14@62.9,149.495 v1(64.805,149.495) ; U11.16@62.9,154.575 v1(64.805,154.575) ; U14.10@62.9,164.735 v1(65.44,164.735) ; U14.12@62.9,169.815 v1(65.44,169.815) ; U14.14@62.9,174.895 v1(65.44,174.895) ; U14.16@62.9,179.975 v1(65.44,179.975) ; v1(70.52,136.795) U10.16@74.33,136.795 ; v1(71.79,162.195) U13.16@74.33,162.195 ; J2.2@72.58,66.5 v2(72.58,69.04) ; v1(90.84,136.795) U12.16@93.38,136.795 ; v1(90.84,141.875) U12.14@93.38,141.875 ; v1(90.84,146.955) U12.12@93.38,146.955 ; v1(90.84,152.035) U12.10@93.38,152.035 ; v1(90.84,162.195) U15.16@93.38,162.195 96.334,162.195 101,157.529 101.221,157.529 102.905,155.845 v1@103.54,155.845 ; v1(90.84,167.275) U15.14@93.38,167.275 ; v1(90.84,172.355) U15.12@93.38,172.355 ; v1(90.84,177.435) U15.10@93.38,177.435 ; 98.46,160.17 99.73,160.17 v1@103.54,156.36 ; U4.16@104.32,74.745 U4.16@104.33,74.735 ; v4(104.33,69.04) U4.16@104.33,74.735 ; v2(107.55,74.7) 104.365,74.7 U4.16@104.33,74.735 ; v2(148.78,69.04) U7.16@148.78,74.735
  other v1: 103.222,155.845
pads on no net: U7.9 U10.7 U13.7 U13.10
copper on no net: | length 1155.6
  Top Layer w0.2: 113.85,150.139 113.85,151.784
  Top Layer w0.25: 30.51,193.79 35.51,193.79 ; 33.01,191.29 33.01,196.29 ; 35.51,141.29 40.51,141.29 ; 38.01,138.79 38.01,143.79 ; 108.01,136.29 109.26,136.29 111.76,136.29 113.01,136.29 ; 108.01,193.79 113.01,193.79 ; 110.51,133.79 110.51,138.79 ; 110.51,191.29 110.51,196.29 ; 30.51,128.79 30.51,201.29 115.51,201.29 115.51,128.79 100.51,128.79 30.51,128.79
  Top Layer w0.3: 31,67 35,67 ; 31,117 35,117 ; 33,65 33,69 ; 33,115 33,119 ; 159,67 163,67 ; 159,117 163,117 ; 161,65 161,69 ; 161,115 161,119
  Bottom Layer w0.25: 30.51,193.79 35.51,193.79 ; 33.01,191.29 33.01,196.29 ; 35.51,141.29 40.51,141.29 ; 38.01,138.79 38.01,143.79 ; 108.01,136.29 113.01,136.29 ; 108.01,193.79 113.01,193.79 ; 110.51,133.79 110.51,138.79 ; 110.51,191.29 110.51,196.29 ; 30.51,128.79 30.51,201.29 115.51,201.29 115.51,128.79 30.51,128.79
  Bottom Layer w0.3: 31,67 35,67 ; 31,117 35,117 ; 33,65 33,69 ; 33,115 33,119 ; 159,67 163,67 ; 159,117 163,117 ; 161,65 161,69 ; 161,115 161,119
  Bottom Layer w0.5: 30,64 164,64 164,120 30,120 30,64
  other v6: 33,67 161,67 33,117 161,117
  other v7: 110.51,136.29 38.01,141.29 33.01,193.79 110.51,193.79
  other v8: 35.51,133.79 110.51,141.29 110.51,188.79 35.51,196.29

## Other copper
Top Layer:
  text "16 IN" at 99.55,198.7 h1.52
  text "x" at 112.5,198.025 h1.52
  text "74 HC 165" at 93.4,196.425 h1.52
  text "v 1.1" at 99.75,194.225 h1.52
  text "DS" at 110.7,165.725 h1.52
  text "L" at 113.625,160.95 h1.52
  text "C" at 113.575,158.25 h1.52
  text "x" at 33.7,136.225 h1.52
  text "x" at 159.025,115.05 h1.52
  text "24 OUT" at 154.325,79.65 h1.52
  text "74HC595" at 152.925,77.3 h1.52
  text "v 1.1" at 156.35,74.9 h1.52
  text "x" at 33.05,71.925 h1.52
Bottom Layer:
  text "x" at 112.5,198.025 h1.52
  text "x" at 33.7,136.225 h1.52
  text "x" at 159.025,115.05 h1.52
  text "x" at 33.05,71.925 h1.52

## Silkscreen, mask and mechanical layers (free items; w line width, h text height)
Top Overlay:
  lines w0.2: 159,65 163,69 ; 159,69 163,65
  text "MR" at 45.325,68.225 h1.52 r90
  text "Ltch" at 50.4,68.175 h1.52 r90
  text "DS" at 53.025,68.175 h1.52 r90
  text "CLK" at 47.95,68.15 h1.52 r90
  text "ON" at 55.8,68.15 h1.52 r90
  text "-" at 77.175,65.675 h1.52
  text "+" at 69.7,65.65 h1.52

## Text inside footprints (layer, text, board x,y; h text height)
J3: Top Overlay "1" at 42.445,187.38 h1.52 r180; Top Overlay "2" at 42.445,195.38 h1.52 r180; Top Overlay "31" at 81.445,187.38 h1.52 r180; Top Overlay "32" at 81.445,195.38 h1.52 r180
J4: Top Overlay "1" at 60.95,115 h1.52; Top Overlay "2" at 60.7,107.95 h1.52; Top Overlay "15" at 42.325,107.9 h1.52; Top Overlay "16" at 42.3,114.975 h1.52
J5: Top Overlay "16" at 86.7,114.975 h1.52; Top Overlay "15" at 86.725,107.9 h1.52; Top Overlay "2" at 105.1,107.95 h1.52; Top Overlay "1" at 105.35,115 h1.52
J6: Top Overlay "16" at 131.2,114.975 h1.52; Top Overlay "15" at 131.225,107.9 h1.52; Top Overlay "2" at 149.6,107.95 h1.52; Top Overlay "1" at 149.85,115 h1.52
VT1: Top Overlay "C" at 80.675,80.275 h1.52 r180; Top Overlay "E" at 83.175,80.275 h1.52 r180; Top Overlay "B" at 78.175,80.275 h1.52 r180